# EAGLE board Hansyah_espcam (EAGLE 9.6.2)
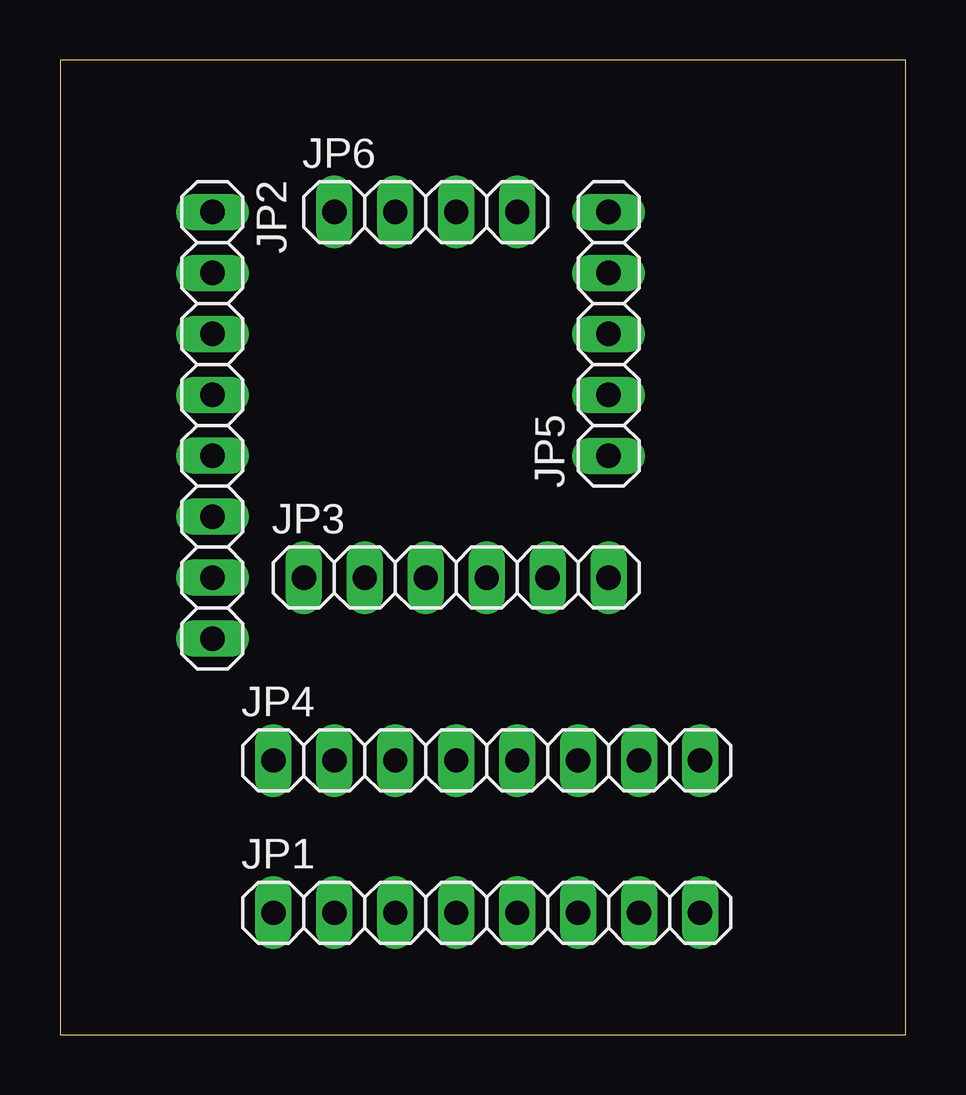
[diagram p0: board, top side]
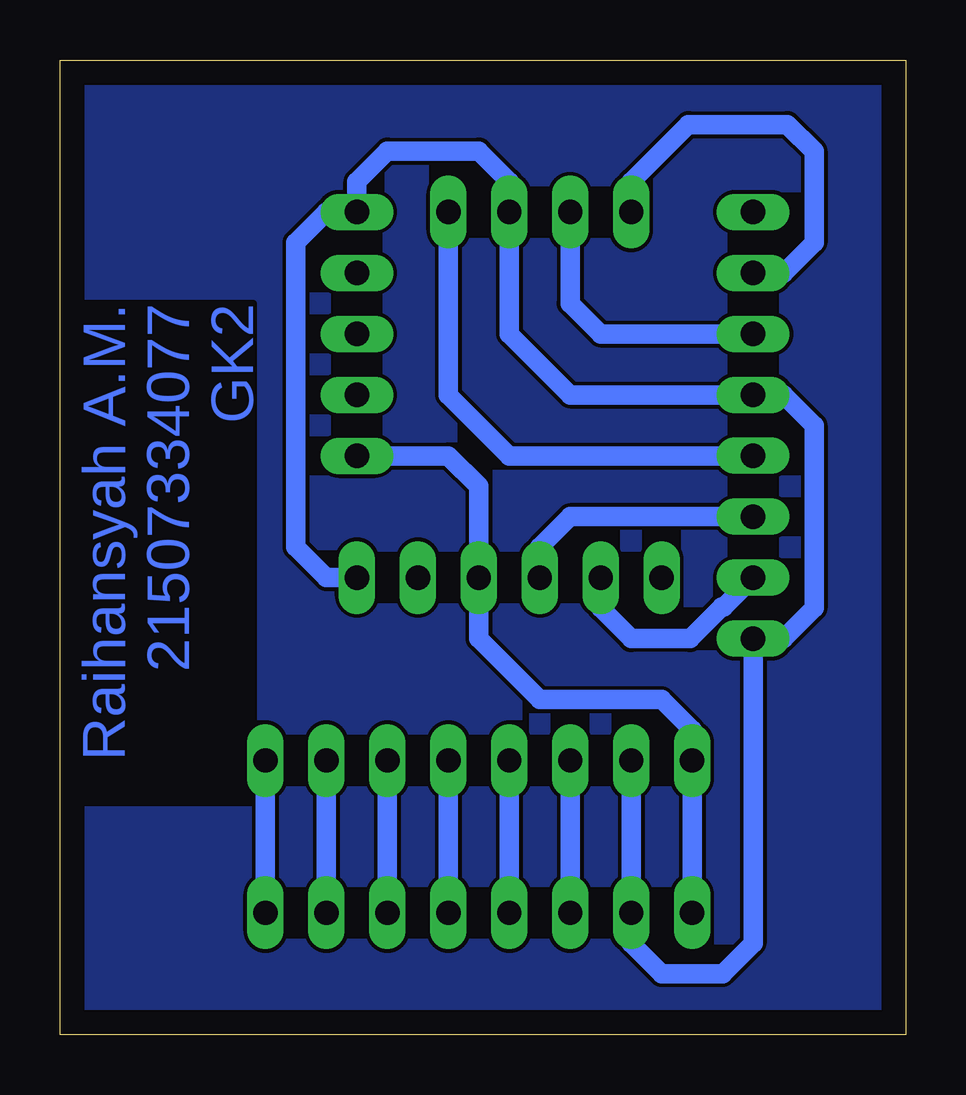
[diagram p1: board, bottom side, seen from below]

Size 35.23 x 40.63 mm. Coordinates in mm from the lower left corner, seen from the top.
Outline: 0,0 35.23,0 35.23,40.63 0,40.63 0,0
Copper layers (1*16): Top 0.035mm / dielectric 1.5mm / Bottom 0.035mm
Design rules "default": minimum track width 6mil, minimum drill 0.35mm, track to track 6mil, track to pad 6mil, pad to pad 6mil, via to via 6mil, smd to smd 6mil, copper to edge 40mil, drill to drill 6mil, minimum pad ring 10mil, minimum via ring 8mil, stop-mask expansion 4mil, vias tented up to drill 0mil, thermal gap 10mil

## Footprints (pad centres in the part's own frame; a part is rotated, then mirrored left to right if it is on the bottom)
1X08 = drill 1.016 long: 1 -8.89,0; 2 -6.35,0; 3 -3.81,0; 4 -1.27,0; 5 1.27,0; 6 3.81,0; 7 6.35,0; 8 8.89,0
1X06 = drill 1.016 long: 1 -6.35,0; 2 -3.81,0; 3 -1.27,0; 4 1.27,0; 5 3.81,0; 6 6.35,0
1X05 = drill 1.016 long: 1 -5.08,0; 2 -2.54,0; 3 0,0; 4 2.54,0; 5 5.08,0
1X04 = drill 1.016 long: 1 -3.81,0; 2 -1.27,0; 3 1.27,0; 4 3.81,0

## Placement (x,y rotation side)
JP1  [1X08]  17.78,5.08 0 top
JP2  [1X08]  6.35,25.4 270 top
JP3  [1X06]  16.51,19.05 0 top
JP4  [1X08]  17.78,11.43 0 top
JP5  [1X05]  22.86,29.21 90 top
JP6  [1X04]  15.24,34.29 0 top

## Library data of the parts
JP1-JP6 = pinhead

## Nets
3V3: JP2.1
5V: JP1.1 JP3.4 JP4.1 JP5.1
GND: JP1.2 JP2.4 JP2.8 JP3.6 JP4.2 JP5.5 JP6.3
IO0: JP2.3 JP6.2
IO2: JP1.7 JP4.7
IO4: JP1.8 JP4.8
IO12: JP1.3 JP4.3
IO13: JP1.4 JP4.4
IO14: JP1.6 JP4.6
IO15: JP1.5 JP4.5
IO16: JP2.2 JP6.1
RX: JP2.7 JP3.2
TX: JP2.6 JP3.3
VOUT: JP2.5 JP6.4

## Tracks (layer width: path | path; a pad name or v marks a point on that pad's centre or on a via)
5V
  Bottom 0.813: JP5.1 19.05,24.13 17.78,22.86 JP3.4 17.78,16.51 15.24,13.97 10.16,13.97 8.89,12.7 JP4.1 JP1.1
GND
  Bottom 0.813: JP3.6 24.13,19.05 25.4,20.32 25.4,33.02 24.13,34.29 JP5.5 22.86,35.56 21.59,36.83 17.78,36.83 16.51,35.56 JP6.3 16.51,29.21 13.97,26.67 JP2.4 5.08,26.67 3.81,25.4 3.81,17.78 5.08,16.51 JP2.8 6.35,3.81 7.62,2.54 10.16,2.54 11.43,3.81 JP1.2 JP4.2
IO0
  Bottom 0.813: JP6.2 13.97,30.48 12.7,29.21 JP2.3
IO2
  Bottom 0.813: JP4.7 JP1.7
IO4
  Bottom 0.813: JP4.8 JP1.8
IO12
  Bottom 0.813: JP4.3 JP1.3
IO13
  Bottom 0.813: JP4.4 JP1.4
IO14
  Bottom 0.813: JP4.6 JP1.6
IO15
  Bottom 0.813: JP4.5 JP1.5
IO16
  Bottom 0.813: JP6.1 11.43,35.56 9.05,37.94 4.92,37.94 3.81,36.83 3.81,33.02 5.08,31.75 JP2.2
RX
  Bottom 0.813: JP2.7 7.57,17.83 7.66,17.83 8.98,16.51 11.43,16.51 12.7,17.78 JP3.2
TX
  Bottom 0.813: JP2.6 13.97,21.59 15.24,20.32 JP3.3
VOUT
  Bottom 0.813: JP6.4 19.05,26.67 16.51,24.13 JP2.5
YY
  pour Bottom: 0,40.64 35.56,40.64 35.56,0 0,0

## Text on the board
Bottom: Raihansyah A.M. / 21507334077 / GK2